# EAGLE board balloonSAT-mk1 (EAGLE 6.5.0)
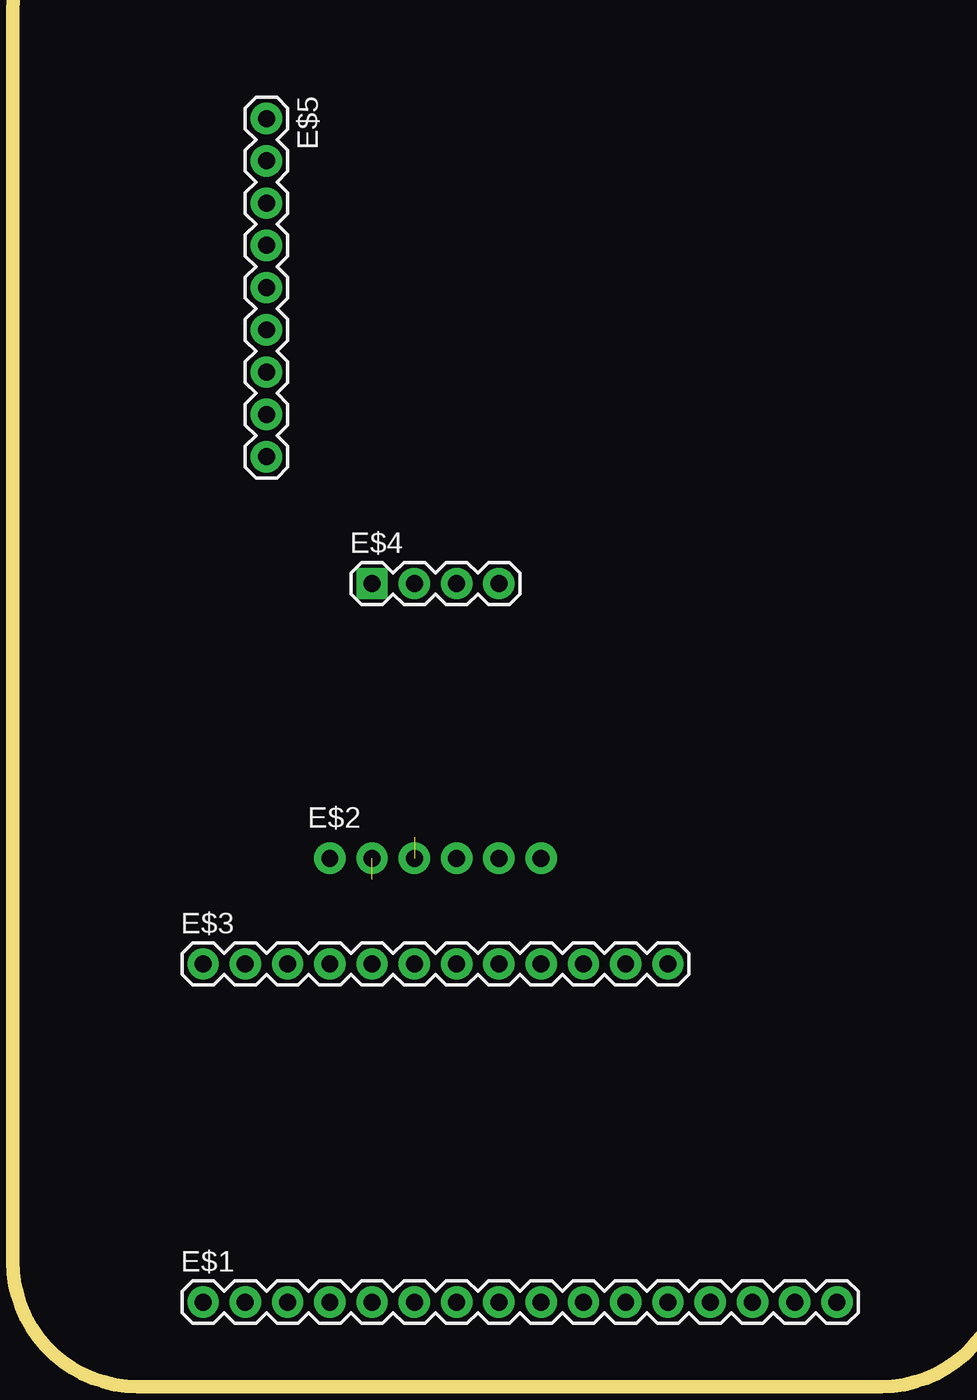
[diagram p0: board, top side]
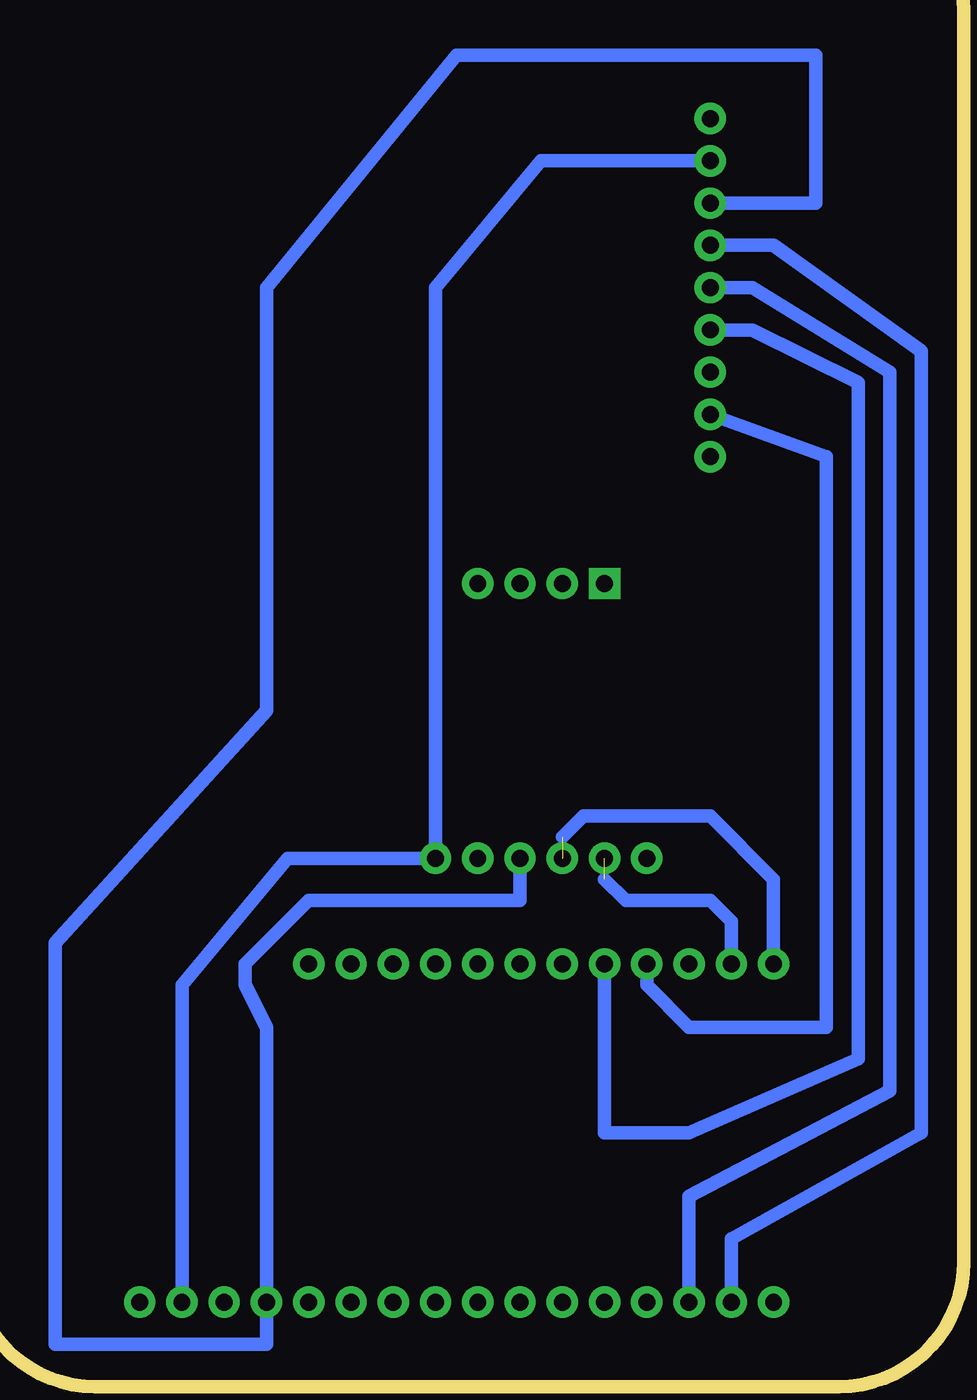
[diagram p1: board, bottom side, seen from below]

No outline drawn. Coordinates in mm, seen from the top.
Copper layers (1*16): Top 0.035mm / dielectric 1.5mm / Bottom 0.035mm
Design rules "default *": minimum track width 16mil, minimum drill 24mil, track to track 16mil, track to pad 16mil, pad to pad 16mil, via to via 16mil, smd to smd 16mil, copper to edge 40mil, drill to drill 16mil, minimum pad ring 10mil, minimum via ring 8mil, stop-mask expansion 4mil, vias tented up to drill 0mil, thermal gap 16mil
Net classes: 0 default: width 0.813 mm
Milling: 8 lines

## Footprints (pad centres in the part's own frame; a part is rotated, then mirrored left to right if it is on the bottom)
1X16 = drill 1.016 pad 1.88: 1 0,0; 2 2.54,0; 3 5.08,0; 4 7.62,0; 5 10.16,0; 6 12.7,0; 7 15.24,0; 8 17.78,0; 9 20.32,0; 10 22.86,0; 11 25.4,0; 12 27.94,0; 13 30.48,0; 14 33.02,0; 15 35.56,0; 16 38.1,0
1X06 = drill 1.016 pad 1.88: 1 0,0; 2 2.54,0; 3 5.08,0; 4 7.62,0; 5 10.16,0; 6 12.7,0
1X12 = drill 1.016 pad 1.88: 1 0,0; 2 2.54,0; 3 5.08,0; 4 7.62,0; 5 10.16,0; 6 12.7,0; 7 15.24,0; 8 17.78,0; 9 20.32,0; 10 22.86,0; 11 25.4,0; 12 27.94,0
1X04 = drill 1.016 pad 1.88 square: 1 0,0 | drill 1.016 pad 1.88: 2 2.54,0; 3 5.08,0; 4 7.62,0
1X09 = drill 1.016 pad 1.88: 1 0,0; 2 2.54,0; 3 5.08,0; 4 7.62,0; 5 10.16,0; 6 12.7,0; 7 15.24,0; 8 17.78,0; 9 20.32,0

## Placement (x,y rotation side)
E$1  [1X16]  11.43,5.08 0 top
E$2  [1X06]  19.05,31.75 0 top
E$3  [1X12]  11.43,25.4 0 top
E$4  [1X04]  21.59,48.26 0 top
E$5  [1X09]  15.24,76.2 270 top

## Library data of the parts
E$1-E$5 = SparkFun-Connectors

## Nets
S$1: E$2.2 E$3.2
S$2: E$2.3 E$3.1
S$3: E$1.3 E$5.5
S$4: E$1.2 E$5.4
S$5: E$1.15 E$2.6 E$5.2
S$6: E$3.4 E$5.8
S$7: E$3.5 E$5.6
S$8: E$1.13 E$2.4 E$5.3

## Tracks (layer width: path | path; a pad name or v marks a point on that pad's centre or on a via)
S$1  (1 unrouted)
  Bottom 0.813: E$3.2 13.97,27.94 15.24,29.21 20.32,29.21 21.59,30.48
S$2  (1 unrouted)
  Bottom 0.813: E$3.1 11.43,30.48 15.24,34.29 22.86,34.29 24.13,33.02
S$3
  Bottom 0.813: E$1.3 16.51,11.43 4.45,17.78 4.45,60.96 12.7,66.04 E$5.5
S$4
  Bottom 0.813: E$1.2 13.97,8.89 2.54,15.24 2.54,62.23 11.43,68.58 E$5.4
S$5
  Bottom 0.813: E$1.15 46.99,24.13 40.64,31.75 E$2.6 31.75,66.04 25.4,73.66 E$5.2
S$6
  Bottom 0.813: E$5.8 8.26,55.88 8.26,21.59 16.51,21.59 19.05,24.13 E$3.4
S$7
  Bottom 0.813: E$5.6 12.7,63.5 6.35,60.33 6.35,19.68 16.51,15.24 21.59,15.24 E$3.5
S$8
  Bottom 0.813: E$5.3 8.89,71.12 8.89,80.01 30.48,80.01 41.91,66.04 41.91,40.64 54.61,26.67 54.61,2.54 41.91,2.54 E$1.13 41.91,21.59 43.18,24.13 43.18,25.4 39.37,29.21 26.67,29.21 E$2.4